# Altium PCB Board1.PcbDoc
Units mm, origin at the board's own origin, x right, y up, seen from the top; angles counter-clockwise.
Board outline 99.44 x 99.31 mm, 2 copper layers (Top Layer, Bottom Layer); 118 components, 68 nets, 479 pads, 4 vias.
Unrouted connection lines stored in the file: 256.
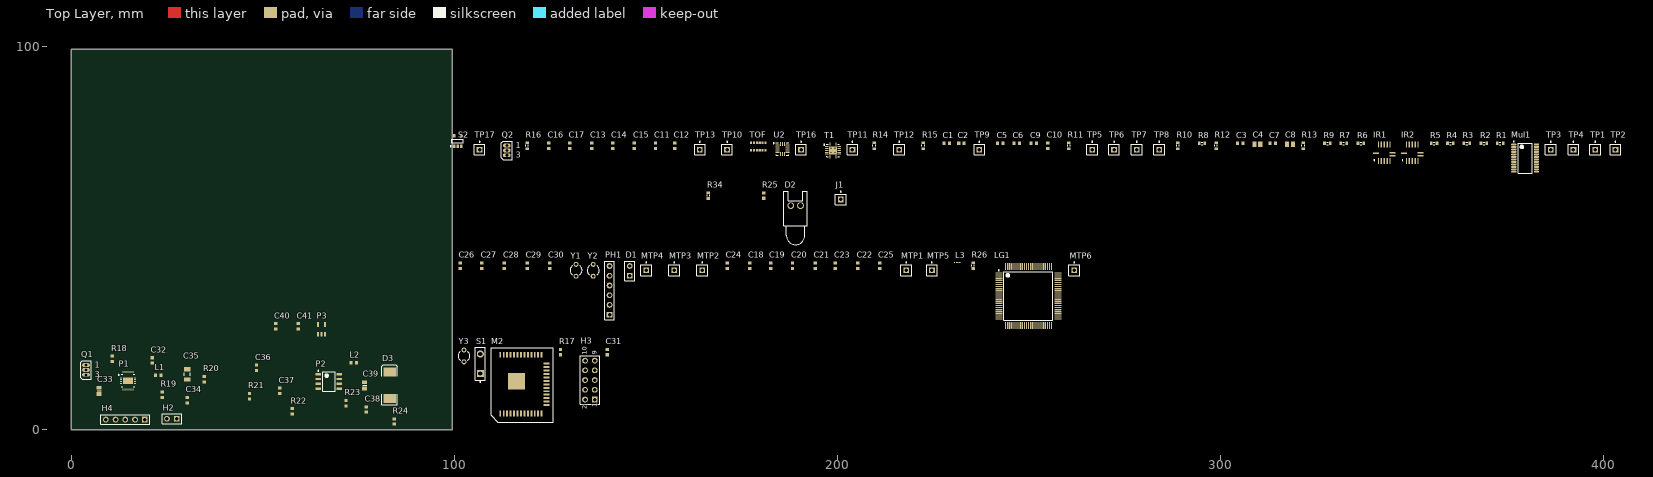
[diagram p0: Top Layer view]
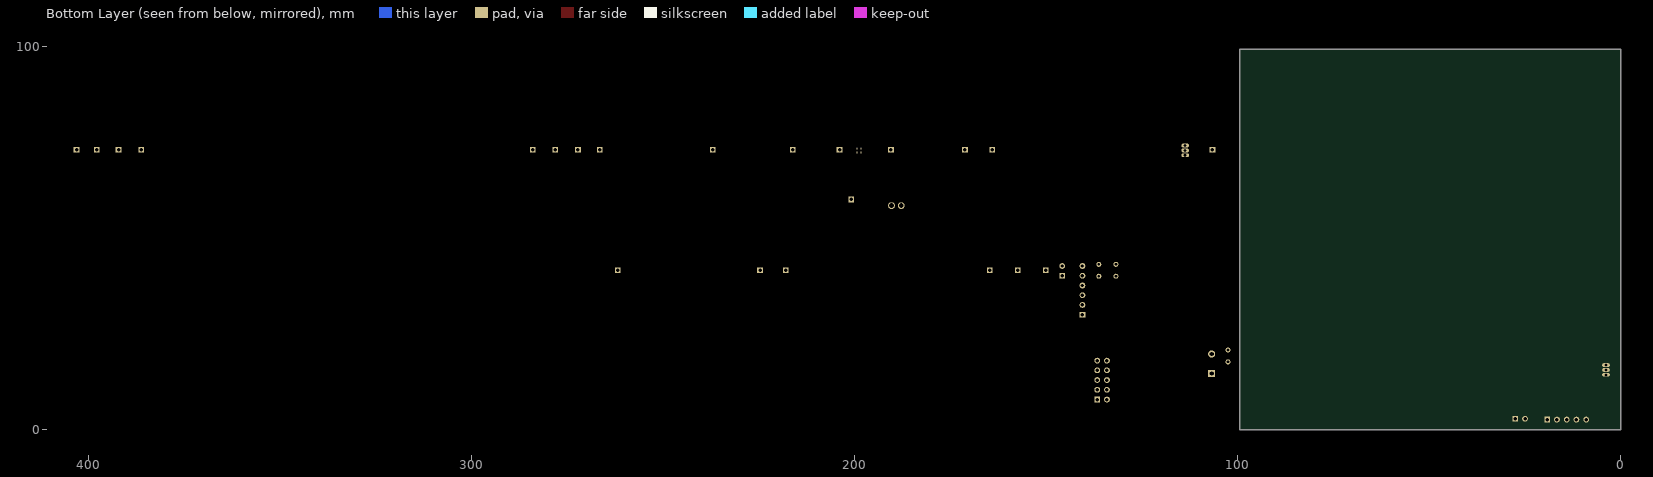
[diagram p1: Bottom Layer view, seen from below]

## Layer stack, top to bottom
Top Solder: solder mask 0.0102, Solder Resist, Dk 3.5
Top Layer: signal copper 0.0356
Dielectric1: dielectric 0.32, FR-4, Dk 4.8
Bottom Layer: signal copper 0.0356
Bottom Solder: solder mask 0.0102, Solder Resist, Dk 3.5

## Board outline
0,0 0,99.314 99.441,99.314 99.441,0

## Design rules (kind name [scope] priority, off if disabled: settings)
Clearance [All] p1: gap=0.254 ignorepadtopadclearanceinfootprint=FALSE except(0: Arc-Hole Track-Hole SMDPad-Hole THPad-Hole Via-Hole Fill-Hole Poly-Hole Region-Hole Text-Hole; 0.203: Arc-SMDPad Track-Track Track-SMDPad SMDPad-SMDPad; 0.508: Arc-Via Track-Via THPad-Via Via-Via; 0.635: Arc-Poly Track-Poly SMDPad-Poly THPad-Poly Via-Poly Fill-Poly Poly-Poly)
FabricationTestPointUsage TestPointUsage [All] p1: valid=0 allowmultiple=FALSE
FabricationTestpoint Testpoint [All] p1: side=3 testpointundercomponent=TRUE minsize=1.016 maxsize=2.54 preferedsize=1.524 minholesize=0 maxholesize=1.016 preferedholesize=0.813 testpointgrid=0.025 allowsidetop=TRUE allowsidebottom=TRUE usegrid=TRUE gridtolerance=0
PolygonConnect [All] p1: connectstyle=Relief reliefconductorwidth=0.254 reliefentries=4 polygonreliefangle="90 Angle" airgapwidth=0.254
RoutingVias [All] p1: holewidth=0.305 width=0.61 viastyle="Through Hole" minholewidth=0.254 minwidth=0.508 maxholewidth=0.356 maxwidth=0.711
SilkToSolderMaskClearance SilkscreenOverComponentPads [IsPad] p1: minsilkscreentomaskgap=0.254 clearancetoexposedcopper=TRUE
SolderMaskExpansion [All] p1: expansion=0.102
Width Width_1 [All] p1: maxlimit=0.254 minlimit=0.254 preferedwidth=0.254
Width Width_power [(InNet('2.8V') OR InNet('3.3V') OR InNet('4V') OR InNet('5V') OR InNet('GND'))] p2: maxlimit=0.508 minlimit=0.305 preferedwidth=0.508
27 further rules are at their usual default settings.

## Components (designator, comment, footprint, x,y, rotation, side; value= is the part's Value field where it differs from the comment)
C1 "Cap Semi" 1608[0603] 228.498,74.727 r0 top value=10uF
C2 "Cap Semi" 1608[0603] 232.359,74.727 r0 top value=0.1uF
C3 "Cap Semi" 1608[0603] 305.105,74.727 r0 top value=0.1uF
C4 "Cap Semi" C0805 309.575,74.524 r0 top value=22uF
C5 "Cap Semi" 1608[0603] 242.519,74.727 r0 top value=10uF
C6 "Cap Semi" 1608[0603] 246.786,74.727 r0 top value=0.1uF
C7 "Cap Semi" 1608[0603] 313.639,74.727 r0 top value=0.1uF
C8 "Cap Semi" C0805 318.11,74.524 r0 top value=22uF
C9 "Cap Semi" 1608[0603] 251.257,74.727 r0 top value=10uF
C10 "Cap Semi" 1608[0603] 254.914,74.117 r90 top value=0.1uF
C11 "Cap Semi" 1608[0603] 152.502,74.117 r90 top value=4.7uF
C12 "Cap Semi" 1608[0603] 157.582,74.117 r90 top value=0.1uF
C13 "Cap Semi" 1608[0603] 135.839,74.117 r90 top value=4.7uF
C14 "Cap Semi" 1608[0603] 141.326,74.117 r90 top value=0.1uF
C15 "Cap Semi" 1608[0603] 147.015,74.117 r90 top value=0.1uF
C16 "Cap Semi" 1608[0603] 124.663,74.117 r90 top value=1uF
C17 "Cap Semi" 1608[0603] 130.15,74.117 r90 top value=1uF
C18 "Cap Semi" 1608[0603] 177.089,42.824 r90 top value=0.1uF
C19 "Cap Semi" 1608[0603] 182.575,42.824 r90 top value=0.1uF
C20 "Cap Semi" 1608[0603] 188.265,42.824 r90 top value=0.1uF
C21 "Cap Semi" 1608[0603] 194.158,42.824 r90 top value=0.1uF
C22 "Cap Semi" 1608[0603] 205.334,42.824 r90 top value=0.1uF
C23 "Cap Semi" 1608[0603] 199.441,42.824 r90 top value=0.1uF
C24 "Cap Semi" 1608[0603] 171.196,42.824 r90 top value=10uF
C25 "Cap Semi" 1608[0603] 211.023,42.824 r90 top value=10uF
C26 "Cap Semi" 1608[0603] 101.498,42.824 r90 top value=1uF
C27 "Cap Semi" 1608[0603] 107.188,42.824 r90 top value=7.5pF
C28 "Cap Semi" 1608[0603] 113.081,42.824 r90 top value=7.5pF
C29 "Cap Semi" 1608[0603] 118.974,42.824 r90 top value=18pF
C30 "Cap Semi" 1608[0603] 124.866,42.824 r90 top value=18pF
C31 "Cap Semi" 1608[0603] 139.903,20.269 r90 top value=10uF
C32 "Cap Semi" 1608[0603] 21.133,18.085 r90 top value=0.1uF
C33 "Cap" 6-0805_L 7.315,10.16 r90 top value=47uF
C34 "Cap" 1608[0603] 30.277,7.722 r90 top value=0.1uF
C35 "Cap" C1206 30.277,14.427 r90 top value=22uF
C36 "Cap" 1608[0603] 48.362,16.166 r90 top value=4.7uF
C37 "Cap" 1608[0603] 54.458,10.16 r90 top value=100pF
C38 "Cap" 1608[0603] 77.013,5.283 r90 top value=330pF
C39 "Cap" 6-0805_L 76.606,11.582 r90 top value=47uF
C40 "Cap Semi" 1608[0603] 53.34,26.975 r90 top value=0.1uF
C41 "Cap Semi" 1608[0603] 59.233,26.975 r90 top value=0.1uF
D1 "Data Out" HDR1X2 145.796,40.183 r90 top
D2 "LED0" LED-0 189.078,58.471 r0 top
D3 "Diode" SMC 83.109,11.582 r90 top
H2 "Li-on" HDR1X2 27.534,2.845 r180 top
H3 "Header 5X2" HDR2X5 136.652,7.874 r90 top
H4 "USB Header" HDR1X5 19.202,2.642 r180 top
IR1 "VCNL4010" 13-WQFN 342.697,72.288 r0 top
IR2 "VCNL4010" 13-WQFN 350.012,72.288 r0 top
J1 "Socket" PIN1 200.863,60.096 r0 top
L1 "Inductor" 1608[0603] 22.758,14.224 r0 top value=3.3uH
L2 "Inductor" 1608[0603] 73.762,17.475 r0 top value=4.7uH
L3 "Inductor" 0603 231.546,43.637 r0 top value="1kohm @ 100 MHz"
LG1 "" ENMR-LQFP100_M 249.834,34.9 r0 top
M2 "" atmel_samb11 124.054,4.216 r90 top
MTP1 "Socket" PIN1 217.932,41.605 r0 top
MTP2 "Socket" PIN1 164.694,41.605 r0 top
MTP3 "Socket" PIN1 157.378,41.605 r0 top
MTP4 "Socket" PIN1 150.063,41.605 r0 top
MTP5 "Socket" PIN1 224.638,41.605 r0 top
MTP6 "Socket" PIN1 261.823,41.605 r0 top
Mul1 "TCA9548A" TTSOP-24 379.476,70.866 r0 top
P1 "LTC4160EUDC#PBF" LT4160 14.834,12.802 r0 top
P2 "LT1308IS8" LTC1308 67.259,12.598 r0 top
P3 "MIC5219 2.8V" SOT23-5 65.329,26.162 r0 top
PH1 "Programming Header" HDR1X6 140.513,30.023 r90 top
Q1 "MOSFET-N" E3 3.861,15.596 r0 top
Q2 "MOSFET-N" E3 113.69,72.898 r0 top
R1 "Res3" J1-0603 372.974,74.727 r0 top value=4.7K
R2 "Res3" J1-0603 368.706,74.727 r0 top value=4.7K
R3 "Res3" J1-0603 364.236,74.727 r0 top value=4.7K
R4 "Res3" J1-0603 359.969,74.727 r0 top value=4.7K
R5 "Res3" J1-0603 355.702,74.727 r0 top value=4.7K
R6 "Res3" J1-0603 336.601,74.727 r0 top value=4.7K
R7 "Res3" J1-0603 332.13,74.727 r0 top value=4.7K
R8 "Res3" J1-0603 295.148,74.727 r0 top value=4.7K
R9 "Res3" J1-0603 327.863,74.727 r0 top value=4.7K
R10 "Res3" J1-0603 288.849,74.117 r90 top value=4.7K
R11 "Res3" J1-0603 260.401,74.117 r90 top value=10K
R12 "Res3" J1-0603 298.806,74.117 r90 top value=10
R13 "Res3" J1-0603 321.564,74.117 r90 top value=10
R14 "Res3" J1-0603 209.601,74.117 r90 top value=4.7K
R15 "Res3" J1-0603 222.402,74.117 r90 top value=4.7K
R16 "Res3" J1-0603 118.974,74.117 r90 top value=2.2K
R17 "Res1" 1608[0603] 127.711,20.269 r90 top value=10K
R18 "Res1" 1608[0603] 10.77,18.491 r90 top value=6.2K
R19 "Res1" 1608[0603] 23.774,9.144 r90 top value=1K
R20 "Res1" 1608[0603] 34.747,13.208 r90 top value=3.01K
R21 "Res1" 1608[0603] 46.533,8.738 r90 top value=47K
R22 "Res1" 1608[0603] 57.709,4.786 r90 top value=10K
R23 "Res1" 1608[0603] 71.73,6.909 r90 top value=35.7K
R24 "Res1" 1608[0603] 84.328,2.145 r90 top value=11.3K
R25 "Res1" 1608[0603] 180.746,61.112 r90 top value=3K
R26 "Res3" J1-0603 235.407,42.824 r90 top value=10
R34 "Res3" J1-0603 166.319,61.112 r90 top value=0
S1 "SW-PB" SPST-2 106.782,17.221 r90 top
S2 "LTC1981" LTC1981 100.889,75.336 r90 top
T1 "TXS0104E" TXS01014E 198.831,72.898 r0 top
TOF "VL6180" VL6180 179.324,73.914 r0 top
TP1 "Socket" PIN1 397.764,73.101 r0 top
TP2 "Socket" PIN1 403.047,73.101 r0 top
TP3 "Socket" PIN1 386.182,73.101 r0 top
TP4 "Socket" PIN1 392.074,73.101 r0 top
TP5 "Socket" PIN1 266.497,73.101 r0 top
TP6 "Socket" PIN1 272.186,73.101 r0 top
TP7 "Socket" PIN1 278.079,73.101 r0 top
TP8 "Socket" PIN1 283.972,73.101 r0 top
TP9 "Socket" PIN1 237.033,73.101 r0 top
TP10 "Socket" PIN1 171.196,73.101 r0 top
TP11 "Socket" PIN1 203.911,73.101 r0 top
TP12 "Socket" PIN1 216.103,73.101 r0 top
TP13 "Socket" PIN1 164.084,73.101 r0 top
TP16 "Socket" PIN1 190.5,73.101 r0 top
TP17 "Socket" PIN1 106.578,73.101 r0 top
U2 "MMA8452Q" MMA8452Q_jk 185.623,73.304 r0 top
Y1 "XTAL" R38 131.775,41.605 r0 top
Y2 "XTAL" R38 136.246,41.605 r0 top
Y3 "XTAL" R38 102.514,19.253 r0 top

## Footprints (in the part's own frame and the unit in brackets; to place one, negate y for a bottom-side part, rotate by r counter-clockwise, add the part's x,y. Pads: shape width x height; smd on the part's side, far side on the other; paste and mask are expansions set on the pad)
6-0805_L [mm] "Chip Resistor, Body 2.0x1.2mm, IPC High Density"
  rect 1x1.3 smd: 1(-0.8,0) 2(0.8,0)
  silkscreen extent 0,-0.55 0,0.55, body extent -1.07,-0.7 1.07,0.7, height 0.7
13-WQFN [mm] "Footprint for VCNL4010"
  rect 0.35x1.605 smd: 1(-1.5,-2.173) 2(-0.75,-2.173) 3(0,-2.173) 4(0.75,-2.173) 5(1.5,-2.173) 7(1.5,2.173) 8(0.75,2.173) 9(0,2.173) 10(-0.75,2.173) 11(-1.5,2.173)
  rect 1.605x0.4 smd: 6(2.173,-0.8) 12(-2.173,-0.175) 13(2.173,0)
  silkscreen extent -2.67,-2.03 -2.41,-1.78, body extent -1.97,-1.97 1.98,1.98, height 0.75
0603 [mm] "Chip Inductor, Body 0.6x0.3mm, IPC High Density"
  rect 0.5x0.3 smd: 1(-0.35,0) 2(0.35,0)
  silkscreen extent -0.9,-0.05 -0.9,0.05, body extent -0.33,-0.18 0.33,0.18, height 0.55
1608[0603] [mm] "Chip Capacitor, Body 1.6x0.8mm, IPC High Density"
  rect 0.8x0.9 smd: 1(-0.7,0) 2(0.7,0)
  body extent -0.87,-0.48 0.87,0.48, height 1.3
atmel_samb11 [mm]
  rect 1.5x0.5 smd: 1(0,12.066) 2(0,11.166) 3(0,10.266) 4(0,9.366) 5(0,8.466) 6(0,7.566) 7(0,6.666) 8(0,5.766) 9(0,4.866) 10(0,3.966) 11(0,3.066) 12(0,2.166) 13(0,1.266) 27(15.367,1.266) 28(15.367,2.166) 29(15.367,3.066) 30(15.367,3.966) 31(15.367,4.866) 32(15.367,5.766) 33(15.367,6.666) 34(15.367,7.566) 35(15.367,8.466) 36(15.367,9.366) 37(15.367,10.266) 38(15.367,11.166) 39(15.367,12.066)
  rect 0.5x1.5 smd: 14(2.222,0) 15(3.122,0) 16(4.022,0) 17(4.922,0) 18(5.822,0) 19(6.722,0) 20(7.622,0) 21(8.522,0) 22(9.422,0) 23(10.322,0) 24(11.222,0) 25(12.122,0) 26(13.022,0)
  rect 4.4x4.4 smd: 40(8.424,7.806)
  silkscreen extent -2.29,-1.78 17.14,14.48
C0805 [mm] "Chip Capacitor, Body 2.0x1.3mm, IPC High Density"
  rect 1.1x1.4 smd: 1(-0.75,0) 2(0.75,0)
  body extent -1.1,-0.72 1.1,0.72, height 1.4
C1206 [mm] "Chip Capacitor, Body 3.2x1.6mm, IPC High Density"
  rect 1.1x1.7 smd: 1(-1.35,0) 2(1.35,0)
  silkscreen extent -0.4,-0.75 0.4,0.75, body extent -1.7,-0.9 1.7,0.9, height 1.3
E3 [mm] "TO, Flat Index; 3 In-Line, Axial Leads; Body Dia. 4.6mm; Lead Dia. 0.5 mm (max)"
  oval 2x1 hole 0.8: 1(0,1.27) 2(0,0) 3(0,-1.27)
  silkscreen extent -1.41,-2.41 1.41,2.41
ENMR-LQFP100_M [mm] "LQFP, 100-Leads, Body 14x14mm, Pitch 0.5mm, IPC Low Density"
  oval 1.85x0.3 smd: 1(-7.7,6) 2(-7.7,5.5) 3(-7.7,5) 4(-7.7,4.5) 5(-7.7,4) 6(-7.7,3.5) 7(-7.7,3) 8(-7.7,2.5) 9(-7.7,2) 10(-7.7,1.5) 11(-7.7,1) 12(-7.7,0.5) 13(-7.7,0) 14(-7.7,-0.5) 15(-7.7,-1) 16(-7.7,-1.5) 17(-7.7,-2) 18(-7.7,-2.5) 19(-7.7,-3) 20(-7.7,-3.5) 21(-7.7,-4) 22(-7.7,-4.5) 23(-7.7,-5) 24(-7.7,-5.5) 25(-7.7,-6) 51(7.7,-6) 52(7.7,-5.5) 53(7.7,-5) 54(7.7,-4.5) 55(7.7,-4) 56(7.7,-3.5) 57(7.7,-3) 58(7.7,-2.5) 59(7.7,-2) 60(7.7,-1.5) 61(7.7,-1) 62(7.7,-0.5) 63(7.7,0) 64(7.7,0.5) 65(7.7,1) 66(7.7,1.5) 67(7.7,2) 68(7.7,2.5) 69(7.7,3) 70(7.7,3.5) 71(7.7,4) 72(7.7,4.5) 73(7.7,5) 74(7.7,5.5) 75(7.7,6)
  oval 0.3x1.85 smd: 26(-6,-7.7) 27(-5.5,-7.7) 28(-5,-7.7) 29(-4.5,-7.7) 30(-4,-7.7) 31(-3.5,-7.7) 32(-3,-7.7) 33(-2.5,-7.7) 34(-2,-7.7) 35(-1.5,-7.7) 36(-1,-7.7) 37(-0.5,-7.7) 38(0,-7.7) 39(0.5,-7.7) 40(1,-7.7) 41(1.5,-7.7) 42(2,-7.7) 43(2.5,-7.7) 44(3,-7.7) 45(3.5,-7.7) 46(4,-7.7) 47(4.5,-7.7) 48(5,-7.7) 49(5.5,-7.7) 50(6,-7.7) 76(6,7.7) 77(5.5,7.7) 78(5,7.7) 79(4.5,7.7) 80(4,7.7) 81(3.5,7.7) 82(3,7.7) 83(2.5,7.7) 84(2,7.7) 85(1.5,7.7) 86(1,7.7) 87(0.5,7.7) 88(0,7.7) 89(-0.5,7.7) 90(-1,7.7) 91(-1.5,7.7) 92(-2,7.7) 93(-2.5,7.7) 94(-3,7.7) 95(-3.5,7.7) 96(-4,7.7) 97(-4.5,7.7) 98(-5,7.7) 99(-5.5,7.7) 100(-6,7.7)
  silkscreen extent -7.82,-6.38 6.38,6.82, body extent -7,-7 7,7, height 1.6
HDR1X2 [mm] "Connector; Header; 2 Position"
  rect 1.5x1.5 hole 0.9: 1(0,0)
  round 1.5 hole 0.9: 2(2.54,0)
  silkscreen extent -1.27,-1.27 3.81,1.27
HDR1X5 [mm] "Connector; Header; 5 Position"
  rect 1.5x1.5 hole 0.9: 1(0,0)
  round 1.5 hole 0.9: 2(2.54,0) 3(5.08,0) 4(7.62,0) 5(10.16,0)
  silkscreen extent -1.27,-1.27 11.43,1.27
HDR1X6 [mm] "Connector; Header; 6 Position"
  rect 1.5x1.5 hole 0.9: 1(0,0)
  round 1.5 hole 0.9: 2(2.54,0) 3(5.08,0) 4(7.62,0) 5(10.16,0) 6(12.7,0)
  silkscreen extent -1.27,-1.27 13.97,1.27
HDR2X5 [mm] "Connector; Header; 5x2 Position"
  rect 1.5x1.5 hole 0.9: 1(0,0)
  round 1.5 hole 0.9: 2(0,2.54) 3(2.54,0) 4(2.54,2.54) 5(5.08,0) 6(5.08,2.54) 7(7.62,0) 8(7.62,2.54) 9(10.16,0) 10(10.16,2.54)
  silkscreen extent -1.27,-1.27 11.43,3.81
J1-0603 [mm] "Chip Resistor, Body 1.6x0.8mm, IPC High Density"
  rect 0.7x0.9 smd: 1(-0.75,0) 2(0.75,0)
  silkscreen extent -0.2,-0.35 0.2,0.35, body extent -0.85,-0.48 0.85,0.48, height 0.9
LED-0 [mil] "LED; 2 Leads"
  round 70 hole 50: 1(50,0) 2(-50,0)
  silkscreen extent -120,-400 120,150
LT4160 [mm] "QFN, 20-Leads, Body 3.50x4.50mm, Pitch 0.50mm, Thermal Pad 2.65x1.65mm, IPC Medium Density"
  oval 0.55x0.25 smd: 1(-1.8,0.75) 2(-1.8,0.25) 3(-1.8,-0.25) 4(-1.8,-0.75) 11(1.8,-0.75) 12(1.8,-0.25) 13(1.8,0.25) 14(1.8,0.75)
  oval 0.25x0.55 smd: 5(-1.25,-2.3) 6(-0.75,-2.3) 7(-0.25,-2.3) 8(0.25,-2.3) 9(0.75,-2.3) 10(1.25,-2.3) 15(1.25,2.3) 16(0.75,2.3) 17(0.25,2.3) 18(-0.25,2.3) 19(-0.75,2.3) 20(-1.25,2.3)
  rect 2.65x1.65 smd: 21(0,0)
  silkscreen extent -2.55,-1.65 1.78,1.65, body extent -1.77,-2.27 1.78,2.27, height 1
LTC1308 [mm] "SOIC, 8-Leads, Body 4.90x3.90mm, Pitch 1.27mm, IPC Medium Density"
  rect 1.45x0.6 smd: 1(-2.725,1.905) 2(-2.725,0.635) 3(-2.725,-0.635) 4(-2.725,-1.905) 5(2.725,-1.905) 6(2.725,-0.635) 7(2.725,0.635) 8(2.725,1.905)
  silkscreen extent -2.85,-2.5 1.6,2.88, body extent -2,-2.5 2,2.5, height 1.35
LTC1981 [mm] "SOT23, 5-Leads, Body 2.90x2.80mm, Pitch 0.95mm, IPC Medium Density"
  rect 1x0.6 smd: 1(-1.375,0.95) 2(-1.375,0) 3(-1.375,-0.95) 4(1.375,-0.95) 5(1.375,0.95)
  silkscreen extent -1.5,-1.5 0.5,1.92, body extent -0.88,-1.5 0.87,1.5, height 1.45
MMA8452Q_jk [mm] "QFN, 16-Leads, Body 3.00x3.00mm, Pitch 0.50mm, IPC Medium Density"
  rect 1.05x0.25 smd: 1(-1.3,1) 2(-1.3,0.5) 3(-1.3,0) 4(-1.3,-0.5) 5(-1.3,-1) 9(1.3,-1) 10(1.3,-0.5) 11(1.3,0) 12(1.3,0.5) 13(1.3,1)
  rect 0.25x1.05 smd: 6(-0.5,-1.3) 7(0,-1.3) 8(0.5,-1.3) 14(0.5,1.3) 15(0,1.3) 16(-0.5,1.3)
  silkscreen extent -2.42,-1.65 1.65,1.65, body extent -1.5,-1.5 1.5,1.5, height 1
PIN1 [mm] "Connector; Plug"
  rect 1.5x1.5 hole 0.9: 1(0,0)
  silkscreen extent -1.4,-1.4 1.4,2.17
R38 [mm] "Crystal, Thru-Hole; 2 Leads; Body 3.1 x 8.2 mm (Dia.xH)"
  round 1.3 hole 0.7: 1(0,1.55) 2(0,-1.55)
  silkscreen extent -1.55,-1.19 1.55,1.17
SMC [mm] "DO-214-AB/SMC; 2 C-Bend Leads; Body 7.9 x 5.9 mm, inc. leads (LxW)"
  rect 2.4x3.3 smd: 1(-3.475,0) 2(3.475,0)
  silkscreen extent -5.07,-2.05 5.43,2.05
SOT23-5 [mm] "SOT23-5"
  rect 0.55x1.2 smd: 1(-0.95,-1.3) 2(0,-1.3) 3(0.95,-1.3) 4(0.95,1.3) 5(-0.95,1.3)
SPST-2 [mm] "Switch; 2 Leads"
  rect 1.85x1.85 hole 1.1: 1(-2.54,0)
  round 1.85 hole 1.1: 2(2.54,0)
  silkscreen extent -4.89,-1.27 4.28,1.27
TTSOP-24 [mm] "TSOP, 24-Leads, Body 7.80x4.40mm, Pitch 0.65mm, IPC Medium Density"
  oval 1.4x0.45 smd: 1(-2.95,3.575) 2(-2.95,2.925) 3(-2.95,2.275) 4(-2.95,1.625) 5(-2.95,0.975) 6(-2.95,0.325) 7(-2.95,-0.325) 8(-2.95,-0.975) 9(-2.95,-1.625) 10(-2.95,-2.275) 11(-2.95,-2.925) 12(-2.95,-3.575) 13(2.95,-3.575) 14(2.95,-2.925) 15(2.95,-2.275) 16(2.95,-1.625) 17(2.95,-0.975) 18(2.95,-0.325) 19(2.95,0.325) 20(2.95,0.975) 21(2.95,1.625) 22(2.95,2.275) 23(2.95,2.925) 24(2.95,3.575)
  silkscreen extent -3.07,-3.95 1.85,4.47, body extent -2.25,-3.95 2.25,3.95, height 1.2
TXS01014E [mm] "QFN, 14-Leads, Body 3.50x3.50mm, Pitch 1.50mm/0.50mm, Thermal Pad 2.05x2.05mm, IPC Medium Density"
  rect 0.9x0.25 smd: 1(-1.675,1) 2(-1.675,0.5) 3(-1.675,0) 4(-1.675,-0.5) 5(-1.675,-1) 8(1.675,-1) 9(1.675,-0.5) 10(1.675,0) 11(1.675,0.5) 12(1.675,1)
  rect 0.25x0.9 smd: 6(-0.75,-1.675) 7(0.75,-1.675) 13(0.75,1.675) 14(-0.75,1.675)
  rect 2.05x2.05 smd: 15(0,0)
  silkscreen extent -2.42,-1.65 1.65,1.65, body extent -1.83,-1.83 1.83,1.83, height 1
VL6180 [mm] "VL6180"
  rect 0.55x0.6 smd paste-0.3: 1(-1.875,-1) 2(-1.125,-1) 3(-0.375,-1) 4(0.375,-1) 5(1.125,-1) 6(1.875,-1) 7(1.875,1) 8(1.125,1) 9(0.375,1) 10(-0.375,1) 11(-1.125,1) 12(-1.875,1)

## Part data
C1 C5 C9 C24 C25: "Capacitor (Semiconductor SIM Model)", Digikey Part No=490-10474-1-ND, Manufacturer="Murata Electronics North America", Manufacturer Part Number=GRM188R61A106KE69D, ComponentLink1Description=Datasheet, ComponentLink1URL=http://search.murata.co.jp/Ceramy/image/img/A01X/partnumbering_e_01.pdf
C2 C6 C7 C10 C12 C14 C15 C18 C19 C20 C21 C22 C23: "Capacitor (Semiconductor SIM Model)", Digikey Part No=399-1095-1-ND, Manufacturer=KEMET, Manufacturer Part Number=C0603C104K8RACTU, ComponentLink1Description=Datasheet, ComponentLink1URL=http://www.kemet.com/Lists/ProductCatalog/Attachments/53/KEM_C1002_X7R_SMD.pdf
C3 C32 C40 C41: "CAP CER 0.1UF 10V X7R 0603", Digikey Part No=399-1095-1-ND, Manufacturer=KEMET, Manufacturer Part Number=C0603C104K8RACTU, ComponentLink1Description=Datasheet, ComponentLink1URL=http://www.kemet.com/Lists/ProductCatalog/Attachments/53/KEM_C1002_X7R_SMD.pdf
C4 C8: "Capacitor (Semiconductor SIM Model)", Digikey Part No=490-10511-1-ND, Manufacturer="Murata Electronics North America", Manufacturer Part Number=GRM21BR61A226ME51L, ComponentLink1Description=Datasheet, ComponentLink1URL=http://search.murata.co.jp/Ceramy/image/img/A01X/partnumbering_e_01.pdf
C11 C13: "Capacitor (Semiconductor SIM Model)", Digikey Part No=490-10477-1-ND, Manufacturer="Murata Electronics North America", Manufacturer Part Number=GRM188R61A475KE15D, ComponentLink1Description=Datasheet, ComponentLink1URL=http://search.murata.co.jp/Ceramy/image/img/A01X/partnumbering_e_01.pdf
C16 C17 C26: "Capacitor (Semiconductor SIM Model)", Digikey Part No=1276-1946-1-ND, Manufacturer="Samsung Electro-Mechanics America, Inc.", Manufacturer Part Number=CL10B105KP8NNNC, ComponentLink1Description=Datasheet, ComponentLink1URL=http://www.digikey.com/product-detail/en/samsung-electro-mechanics-america-inc/CL10B105KP8NNNC/1276-1946-1-ND/3890032
C27 C28: "Capacitor (Semiconductor SIM Model)", Manufacturer=AVX, Manufacturer Part Number=02013A7R5BAT2A, Mouser Part No=581-02013A7R5BAT2A, ComponentLink1Description=Datasheet, ComponentLink1URL=http://www.mouser.com/ProductDetail/AVX/02013A7R5BAT2A/?qs=sGAEpiMZZMs0AnBnWHyRQB52zW9BgkFE2gr3mrXUPHs%3d
C29 C30: "Capacitor (Semiconductor SIM Model)", Digikey Part No=712-1321-1-ND, Manufacturer="Johanson Technology Inc.", Manufacturer Part Number=251R14S180GV4T, ComponentLink1Description=Datasheet, ComponentLink1URL=http://www.digikey.com/product-detail/en/johanson-technology-inc/251R14S180GV4T/712-1321-1-ND/1786783
C31: "CAP CER 10UF 10V X5R 0603", Digikey Part No=490-10474-1-ND, Manufacturer="Murata Electronics North America", Manufacturer Part Number=GRM188R61A106KE69D, ComponentLink1Description=Datasheet, ComponentLink1URL=http://search.murata.co.jp/Ceramy/image/img/A01X/partnumbering_e_01.pdf
C33 C39: "CAP CER 47UF 6.3V X5R 0805", Digikey Part No=490-13249-1-ND, Manufacturer="Murata Electronics North America", Manufacturer Part Number=GRM219R60J476ME44D, ComponentLink1Description=Datasheet, ComponentLink1URL=http://search.murata.co.jp/Ceramy/image/img/A01X/partnumbering_e_01.pdf
C34: "CAP CER 0.1UF 16V X7R 0603", Digikey Part No=311-1088-1-ND, Manufacturer=Yageo, Manufacturer Part Number=CC0603KRX7R7BB104, ComponentLink1Description=Datasheet, ComponentLink1URL=http://www.yageo.com/documents/recent/UPY-GPHC_X7R_6.3V-to-50V_17.pdf
C35: "CAP CER 22UF 6.3V X5R 1206", Digikey Part No=GRM319R60J226ME15D-ND, Manufacturer="Murata Electronics North America", Manufacturer Part Number=GRM319R60J226ME15D, ComponentLink1Description=Datasheet, ComponentLink1URL=http://search.murata.co.jp/Ceramy/image/img/A01X/partnumbering_e_01.pdf
C36: "CAP CER 4.7UF 6.3V X7R 0603", Digikey Part No=1276-2087-1-ND, Manufacturer="Samsung Electro-Mechanics America, Inc.", Manufacturer Part Number=CL10B475KQ8NQNC, ComponentLink1Description=Datasheet, ComponentLink1URL=http://media.digikey.com/pdf/Data%20Sheets/Samsung%20PDFs/CL10B475KQ8NQNC_Spec.pdf
C37: "CAP CER 100PF 50V X7R 0603", Digikey Part No=399-7824-1-ND, Manufacturer=KEMET, Manufacturer Part Number=C0603C101K5RACTU, ComponentLink1Description=Datasheet, ComponentLink1URL=http://www.kemet.com/docfinder?Partnumber=C0603C101K5RACTU
C38: "CAP CER 330PF 100V X7R 0603", Digikey Part No=1276-6658-1-ND, Manufacturer="Samsung Electro-Mechanics America, Inc.", Manufacturer Part Number=CL10B331KC8WPNC, ComponentLink1Description=Datasheet, ComponentLink1URL=http://www.samsungsem.com/kr/support/library/product-catalog/__icsFiles/afieldfile/2016/09/27/MLCC.pdf
D1: library part "Header 2", "Header, 2-Pin", LatestRevisionDate=17-Jul-2002, LatestRevisionNote="Re-released for DXP Platform.", Publisher="Altium Limited"
D2: "Typical INFRARED GaAs LED", LatestRevisionDate=08-Jul-2005, LatestRevisionNote="Mech Layer 1 removed.", PackageDescription="LED; 2 Leads", PackageReference=LED-0, Published=8-Jun-2000, Publisher="Altium Limited"
D3: "Default Diode", Code_JEDEC=DO-214-AB, LatestRevisionDate=17-Jul-2002, LatestRevisionNote="Re-released for DXP Platform.", PackageDescription="DO-214-AB/SMC; 2 C-Bend Leads; Body 7.9 x 5.9 mm, inc. leads (LxW)", PackageReference=SMC, PackageVersion=Sep-1996, Published=8-Jun-2000, Publisher="Altium Limited"
H2: library part "Header 2", "CONN HEADER PH TOP 2POS 2MM", Digikey Part No=455-1704-ND, Manufacturer="JST Sales America Inc.", Manufacturer Part Number=B2B-PH-K-S(LF)(SN), ComponentLink1Description=Datasheet, ComponentLink1URL=http://www.jst-mfg.com/product/pdf/eng/ePH.pdf
H3: "Header, 5-Pin, Dual row", LatestRevisionDate=17-Jul-2002, LatestRevisionNote="Re-released for DXP Platform.", Publisher="Altium Limited"
H4: library part "Header 5", "Header, 5-Pin", LatestRevisionDate=17-Jul-2002, LatestRevisionNote="Re-released for DXP Platform.", Publisher="Altium Limited"
IR1 IR2: "VCNL4010 Proximity and Ambient Light Sensor", Digikey Part Number=VCNL4010-GS08CT-ND, Manufacturer=Vishay, Part Number=VCNL4010
L1: "FIXED IND 3.3UH 30MA 1.3 OHM SMD", Digikey Part No=587-1584-1-ND, Manufacturer="Taiyo Yuden", Manufacturer Part Number=LK16083R3K-T, ComponentLink1Description Datasheet=Datasheet, ComponentLink1URL=http://www.yuden.co.jp/productdata/catalog/en/mlci01_e.pdf
L2: "FIXED IND 4.7UH 350MA 500 MOHM", Digikey Part No=445-6390-1-ND, Manufacturer="TDK Corporation", Manufacturer Part Number=MLZ1608M4R7WT000, ComponentLink1Description Datasheet=Datasheet, ComponentLink1URL=https://product.tdk.com/info/en/catalog/datasheets/inductor_commercial_decoupling_mlz1608_en.pdf
L3: Part Number=74279266, Code_IEC=1005, Code_JEITA=0402, LatestRevisionDate=29-May-2009, LatestRevisionNote="IPC-7351 Footprint Added.", PackageDescription="Chip Inductor", PackageReference=0402-A, Published=8-Jun-2000, Publisher="Altium Limited"
LG1: library part EFM32LG980F256-QFP100, "EFM32 Leopard Gecko, M3 ARM Cortex CPU, 256 KB Flash, 32 KB RAM, 1.85 - 3.8 V Supply, 48 MHz Max Speed, -40 to 85 degC, 100-Pin LQFP, RoHS Compliant", Generic Part Number=EFM32LG980, Supplier Part Number 1=914-1058-2-ND, Supply Voltage (V)="1.85 - 3.8", ARM Cortex CPU=M3, ComponentLink1Description="Manufacturer URL", ComponentLink1URL=http://www.energymicro.com/, ComponentLink2Description=Datasheet, ComponentLink2URL=http://cdn.energymicro.com/dl/devices/pdf/d0122_efm32lg980_datasheet.pdf, ComponentLink3Description="Package Specification", ComponentLink3URL=http://cdn.energymicro.com/dl/devices/pdf/d0006_efm32g280_datasheet.pdf, DatasheetVersion="Rev 1.00", Flash (KB)=256, GPIO=83, LCD=8x34, LESENSE=Y, Max Speed (MHz)=48, Mounting Technology="Surface Mount", OPAMPS=3, PackageDescription="100-Pin Low rofile Quad Flat Package, Body 14 x 14 mm, Pitch 0.5 mm", PackageReference=LQFP100, PackageVersion="Rev. 98A0100QP043_03MAY2007", PartNumber=EFM32LG980F256-QFP100, RAM (KB)=32, Subcategory="EFM32 Leopard Gecko", Supplier 1=Digi-Key, Supplier 2=Digi-Key, Supplier 3=Digi-Key, Supplier 4=Mouser, Supplier Part Number 2=914-1058-1-ND, Supplier Part Number 3=914-1058-6-ND, Supplier Part Number 4=904-EFM32LG980F256, USB=Y
M2: library part ATSAMB11, "Radio"
Mul1: "8-Channel I2C Switch", Digikey Part Number=296-39222-1-ND, Manufacturer="Texas Instruments", Part Number=TCA9548A
P1: "IC SWITCH POWER MANAGER 20-QFN", Digikey Part No=TC4160EUDC#PBF-ND, Manufacturer="Linear Technology", ComponentLink1Description=Datasheet, ComponentLink1URL=http://www.linear.com/docs/27893, Manufacturer Part Number=LTC4160EUDC#PBF
P2: "IC REG BOOST ADJ 2A 8SOIC", Digikey Part No=LT1308IS8#PBF-ND, Manufacturer="Linear Technology", Manufacturer Part Number=LT1308IS8#PBF, ComponentLink1Description=Datasheet, ComponentLink1URL=http://www.linear.com/docs/1489
P3: library part V_REG_MIC52193.3V, "V_REG MIC5219Standard 3.3V and 5V 500mA LDO voltage regulator in SOT-23 layout. Micrel part MIC5219. BP (by-pass) pin is used to lower output noise with 470pF cap, may be left open.", PROD_ID=VREG-09872
PH1: library part "Header 6", "Header, 6-Pin", LatestRevisionDate=17-Jul-2002, LatestRevisionNote="Re-released for DXP Platform.", Publisher="Altium Limited"
Q1 Q2: "N-Channel MOSFET", LatestRevisionDate=17-Jul-2002, LatestRevisionNote="Re-released for DXP Platform.", PackageDescription="TO, Flat Index; 3 In-Line, Axial Leads; Body Dia. 4.6mm; Lead Dia. 0.5 mm (max)", PackageReference=E3, PackageVersion=1995/1996, Published=8-Jun-2000, Publisher="Altium Limited"
R1 R2 R3 R4 R5 R6 R7 R8 R9 R10 R14 R15: "Resistor", Digikey Part No=311-4.7KGRCT-ND, Manufacturer=Yageo, Manufacturer Part Number=RC0603JR-074K7L, ComponentLink1Description=Datasheet, ComponentLink1URL=http://www.digikey.com/product-detail/en/yageo/RC0603JR-074K7L/311-4.7KGRCT-ND/729732
R11: "Resistor", Digikey Part No=311-10KJRCT-ND, Manufacturer=Yageo, Manufacturer Part Number=RC0402JR-0710KL, ComponentLink1Description=Datasheet, ComponentLink1URL=http://www.digikey.com/product-detail/en/yageo/RC0402JR-0710KL/311-10KJRCT-ND/729365
R12 R13 R26: "Resistor", Digikey Part No=311-10.0HRCT-ND, Manufacturer=Yageo, Manufacturer Part Number=RC0603FR-0710RL, ComponentLink1Description=Datasheet, ComponentLink1URL=http://www.digikey.com/product-detail/en/yageo/RC0603FR-0710RL/311-10.0HRCT-ND/729826
R16: "Resistor", Digikey Part No=311-2.20KLRCT-ND, Manufacturer=Yageo, Manufacturer Part Number=RC0402FR-072K2L, ComponentLink1Description=Datasheet, ComponentLink1URL=http://www.digikey.com/product-detail/en/yageo/RC0402FR-072K2L/311-2.20KLRCT-ND/729500
R17 R22 R25: "RES SMD 10K OHM 1% 1/10W 0603", Digikey Part No=311-10.0KHRCT-ND, Manufacturer=Yageo, Manufacturer Part Number=RC0603FR-0710KL, ComponentLink1Description=Datasheet, ComponentLink1URL=http://www.yageo.com.tw/exep/pages/download/literatures/PYu-R_INT-thick_7.pdf
R18: "RES SMD 6.2K OHM 1% 1/10W 0603", Digikey Part No=311-6.20KHRCT-ND, Manufacturer=Yageo, Manufacturer Part Number=RC0603FR-076K2L, ComponentLink1Description=Datasheet, ComponentLink1URL=http://www.yageo.com.tw/exep/pages/download/literatures/PYu-R_INT-thick_7.pdf
R19: "RES SMD 1K OHM 1% 1/10W 0603", Digikey Part No=311-1.00KHRCT-ND, Manufacturer=Yageo, Manufacturer Part Number=RC0603FR-071KL, ComponentLink1Description=Datasheet, ComponentLink1URL=http://www.yageo.com.tw/exep/pages/download/literatures/PYu-R_INT-thick_7.pdf
R20: "RES SMD 3.01K OHM 1% 1/10W 0603", Digikey Part No=311-3.01KHRCT-ND, Manufacturer=Yageo, Manufacturer Part Number=RC0603FR-073K01L, ComponentLink1Description=Datasheet, ComponentLink1URL=http://www.yageo.com.tw/exep/pages/download/literatures/PYu-R_INT-thick_7.pdf
R21: "RES SMD 47K OHM 1% 1/10W 0603", Digikey Part No=311-47.0KHRCT-ND, Manufacturer=Yageo, Manufacturer Part Number=RC0603FR-0747KL, ComponentLink1Description=Datasheet, ComponentLink1URL=http://www.yageo.com.tw/exep/pages/download/literatures/PYu-R_INT-thick_7.pdf
R23: "RES SMD 35.7K OHM 1% 1/10W 0603", Digikey Part No=311-35.7KHRCT-ND, Manufacturer=Yageo, Manufacturer Part Number=RC0603FR-0735K7L, ComponentLink1Description=Datasheet, ComponentLink1URL=http://www.yageo.com.tw/exep/pages/download/literatures/PYu-R_INT-thick_7.pdf
R24: "RES SMD 11.3K OHM 1% 1/10W 0603", Digikey Part No=311-11.3KHRCT-ND, Manufacturer=Yageo, Manufacturer Part Number=RC0603FR-0711K3L, ComponentLink1Description=Datasheet, ComponentLink1URL=http://www.yageo.com.tw/exep/pages/download/literatures/PYu-R_INT-thick_7.pdf
R34: "Resistor", LatestRevisionDate=29-May-2009, LatestRevisionNote="IPC-7351 Footprint Added.", PackageDescription="Chip Resistor", PackageReference=J1-0603, Published=8-Jun-2000, Publisher="Altium Limited"
S1: "Switch", LatestRevisionDate=17-Jul-2002, LatestRevisionNote="Re-released for DXP Platform.", PackageDescription="Switch; 2 Leads", PackageReference=SPST-2, Published=24-Mar-1999, Publisher="Altium Limited"
T1: "TXS0104E LEVEL SHIFTER"
U2: "MMA8452Q 3-Axis, 12/8-bit Digital Accelerometer  Supply Voltage: 1.6-3.6V  Range: +/- 2g, 4g, 8g  Interface: I2C, 12-bit and 8-bit  ODR: 1.56 Hz - 800 Hz  Package: QFN-16      http://cache.freescale.com/files/sensors/doc/data_sheet/MMA8452Q.pdf"
Y1 Y2 Y3: "Crystal Oscillator", LatestRevisionDate=17-Jul-2002, LatestRevisionNote="Re-released for DXP Platform.", PackageDescription="Crystal, Thru-Hole; 2 Leads; Body 3.1 x 8.2 mm (Dia.xH)", PackageReference=R38, Published=8-Jun-2000, Publisher="Altium Limited"
J1 MTP1 MTP2 MTP3 MTP4 MTP5 MTP6 TP1 TP2 TP3 TP4 TP5 TP6 TP7 TP8 TP9 TP10 TP11 TP12 TP13 TP16 TP17: LatestRevisionDate=17-Jul-2002, LatestRevisionNote="Re-released for DXP Platform.", Publisher="Altium Limited"
TOF: PROD_ID=IC-12007

## Via types
v1: diameter 0.5, hole 0.2, Top Layer to Bottom Layer, 4 vias

## Nets (pads, with @x,y where several pads share a name; then routed paths per layer and width w, separated by ;. In a path a pad name is that pad's centre, name@x,y a point inside that pad or via, vN(x,y) a via of type N, cw(c..) or ccw(c..) an arc to the next point about the centre after c; other vN are vias at no path point)
2.8V: C11.2 C12.2 C16.2 C41.2 P3.5 R5.2 R6.2 R14.2 R15.2 T1.1 TOF.8 TOF.10
3.3V: C1.2 C17.2 C18.2 C19.2 C20.2 C21.2 C24.2 C32.1 L3.2 LG1.8 LG1.17 LG1.31 LG1.44 LG1.57 LG1.82 M2.31 MTP5.1 Mul1.24 P1.18 PH1.1 R9.1 R10.1 R17.2 T1.14 TP9.1
4V: C31.2 C35.2 C36.2 C40.2 H3.1 L1.2 L2.1 M2.4 P1.12 P2.3 P2.6 P3.1 P3.3
5V: C38.2 C39.2 D3.2 Q2.1 R23.2 S2.5
BLE_LEUART_RX: LG1.50 M2.5 MTP1.1
BLE_LEUART_TX: LG1.51 M2.6 MTP2.1
GND: C1.1 C3.1 C5.1 C6.1 C7.1 C10.1 C11.1 C13.1 C14.1 C15.1 C16.1 C17.1 C18.1 C19.1 C20.1 C21.1 C22.1 C23.1 C24.1 C25.1 C26.1 C27.1 C28.1 C29.1 C30.1 C31.1 C32.2 C33.1 C34.2 C35.1 C36.1 C37.1 C39.1 C40.1 C41.1 D2.2 H2.2 H3.3 H3.5 H3.9 H4.5 IR1.12 IR1.13 IR2.12 IR2.13 LG1.16 LG1.32 LG1.58 LG1.83 M2.1 M2.14 M2.26 M2.39 M2.40 Mul1.1 Mul1.2 Mul1.12 Mul1.21 P1.7 P1.20 P1.21 P2.4 P3.2 PH1.6 R16.1 R19.1 R20.2 R24.1 S1.1 S2.2 T1.7 TOF.9 TOF.12 U2.5 U2.7 U2.10 U2.12
GPIO_EM4WUO: LG1.1 MTP6.1
HFXTAL_N: C27.2 LG1.43 Y1.1
HFXTAL_P: C28.2 LG1.42 Y1.2
ID: P1.5 R34.1
IR_PWR: C3.2 C7.2 IR1.1 IR2.1 Q2.3 TP17.1
IR_PWR_CTRL: LG1.18 S2.3
LFXTAL_N: C29.2 LG1.25 Y2.1
LFXTAL_P: C30.2 LG1.24 Y2.2
LS_ENABLE: LG1.26 R16.2 T1.8
MMA_INT1: LG1.4 U2.11
MMA_INT2: LG1.5 TP10.1 U2.9
MMA_VDD: C13.2 C14.2 LG1.30 R7.2 R8.2 U2.1 U2.14
NetC5_2: C5.2 C6.2 IR1.7 R12.1
NetC9_2: C9.2 C10.2 IR2.7 R13.1
NetC15_2: C15.2 U2.2
NetC22_2: C22.2 C23.2 C25.2 LG1.41 LG1.45 R26.2
NetC26_2: C26.2 LG1.59
NetC33_2: C33.2 P1.13 Q1.3
NetC34_1: C34.1 P1.17 R20.1
NetC37_2: C37.2 R21.1
NetC38_1: C38.1 R22.1 R23.1 R24.2
NetD2_1: D2.1 R25.2
NetD3_1: D3.1 L2.2 P2.5
NetH4_4: H4.4 R34.2
NetJ1_1: J1.1 R25.1
NetL1_1: L1.1 P1.14
NetL3_1: L3.1 R26.1
NetM2_25: M2.25 Y3.2
NetM2_27: M2.27 Y3.1
NetP1_1: P1.1 Q1.2
NetP1_2: P1.2 R18.2
NetP1_8: P1.8 R19.2
NetP2_1: P2.1 R21.2
NetP2_2: P2.2 R22.2
NetQ2_2: Q2.2 S2.4
RESET_radio: H3.10 LG1.36 M2.22 PH1.5 R17.1 S1.2
SCL: LG1.56 MTP4.1 Mul1.22 R9.2
SCL0: IR1.5 Mul1.5 R2.1 TP2.1
SCL1: IR2.5 Mul1.7 R4.1 TP4.1
SCL2: Mul1.9 R6.1 TOF.5 TP6.1
SCL3: Mul1.11 R8.1 TP8.1 U2.4
SCL_OUT: D1.1 LG1.40
SDA: LG1.55 MTP3.1 Mul1.23 R10.2
SDA0: IR1.4 Mul1.4 R1.1 TP1.1
SDA1: IR2.4 Mul1.6 R3.1 TP3.1
SDA2: Mul1.8 R5.1 TOF.6 TP5.1
SDA3: Mul1.10 R7.1 TP7.1 U2.6
SDA_OUT: D1.2 LG1.39
SWCLK: LG1.76 PH1.3
SWCLK_radio: H3.4 M2.2
SWDIO: LG1.77 PH1.2
SWDIO_radio: H3.2 M2.3
SWO: LG1.78 PH1.4
TOF_INT0: R14.1 T1.2 TOF.4 TP13.1 TP16.1
TOF_INT0_LS: LG1.7 T1.13 TP11.1
TOF_INT1: R15.1 T1.3 TOF.1 TP12.1
TOF_INT1_LS: LG1.6 T1.12
V_BAT: H2.1 P1.11
VBUS: H4.1 Q1.1 R18.1
VCNL_VDD1: LG1.28 R1.2 R2.2 R12.2
VCNL_VDD2: LG1.29 R3.2 R4.2 R13.2
pads on no net: C2.1 C2.2 C4.1 C4.2 C8.1 C8.2 C9.1 C12.1 H3.6 H3.7 H3.8 H4.2 H4.3 IR1.2 IR1.3 IR1.6 IR1.8 IR1.9 IR1.10 IR1.11 IR2.2 IR2.3 IR2.6 IR2.8 IR2.9 IR2.10 IR2.11 LG1.2 LG1.3 LG1.9 LG1.10 LG1.11 LG1.12 LG1.13 LG1.14 LG1.15 LG1.19 LG1.20 LG1.21 LG1.22 LG1.23 LG1.27 LG1.33 LG1.34 LG1.35 LG1.37 LG1.38 LG1.46 LG1.47 LG1.48 LG1.49 LG1.52 LG1.53 LG1.54 LG1.60 LG1.61 LG1.62 LG1.63 LG1.64 LG1.65 LG1.66 LG1.67 LG1.68 LG1.69 LG1.70 LG1.71 LG1.72 LG1.73 LG1.74 LG1.75 LG1.79 LG1.80 LG1.81 LG1.84 LG1.85 LG1.86 LG1.87 LG1.88 LG1.89 LG1.90 LG1.91 LG1.92 LG1.93 LG1.94 LG1.95 LG1.96 LG1.97 LG1.98 LG1.99 LG1.100 M2.7 M2.8 M2.9 M2.10 M2.11 M2.12 M2.13 M2.15 M2.16 M2.17 M2.18 M2.19 M2.20 M2.21 M2.23 M2.24 M2.28 M2.29 M2.30 M2.32 M2.33 M2.34 M2.35 M2.36 M2.37 M2.38 Mul1.3 Mul1.13 Mul1.14 Mul1.15 Mul1.16 Mul1.17 Mul1.18 Mul1.19 Mul1.20 P1.3 P1.4 P1.6 P1.9 P1.10 P1.15 P1.16 P1.19 P2.7 P2.8 P3.4 R11.1 R11.2 S2.1 T1.4 T1.5 T1.6 T1.9 T1.10 T1.11 T1.15 TOF.2 TOF.3 TOF.7 TOF.11 U2.3 U2.8 U2.13 U2.15 U2.16
copper on no net:
  other v1: 198.281,72.348 199.381,72.348 198.281,73.448 199.381,73.448

## Silkscreen, mask and mechanical layers (free items; w line width, h text height)
Mechanical 16:
  drawing of 1874 lines, arcs and shapes, not listed
  text "1" at -29.286,135.509 h1.78
  text "2" at 43.358,135.509 h1.78
  text "3" at 116.51,135.509 h1.78
  text "4" at 189.408,135.509 h1.78
  text "A" at -63.627,112.497 h1.78
  text "A" at 223.393,112.497 h1.78
  text "B" at -63.627,64.44 h1.78
  text "B" at 223.393,64.44 h1.78
  text "C" at -63.627,15.926 h1.78
  text "C" at 223.393,15.926 h1.78
  text "ENGINEER:" at 108.458,-21.082 h1.14
  text "TITLE:" at 146.558,-21.082 h1.14
  text "PCB DESIGNER:" at 108.458,-28.575 h1.14
  text "D" at -63.627,-32.08 h1.78
  text "D" at 223.393,-32.08 h1.78
  text "DATE:" at 108.458,-36.322 h1.14
  text "PART NO.:" at 146.558,-36.322 h1.14
  text "REV:" at 199.898,-36.322 h1.14
  text "Altium Limited" at 75.438,-38.862 h1.78
  text ".PRINT_DATE" at 109.728,-39.37 h1.78
  text "12a Rodborough Rd" at 75.438,-41.402 h1.78
  text "Frenchs Forest" at 75.438,-43.942 h1.78
  text "FILE NAME:" at 108.458,-43.942 h1.14
  text "DWG NO:" at 146.558,-43.942 h1.14
  text "SCALE:" at 199.898,-43.942 h1.14
  text "NSW 2086" at 75.438,-46.482 h1.78
  text ".PCB_FILE_NAME_NO_PATH" at 109.728,-46.99 h1.78
  text "1" at -29.286,-52.451 h1.78
  text "2" at 43.358,-52.451 h1.78
  text "3" at 116.51,-52.451 h1.78
  text "4" at 189.408,-52.451 h1.78

## Text inside footprints (layer, text, board x,y; h text height)
H3: Top Overlay "10" at 134.62,19.558 h1.27 r90; Top Overlay "9" at 137.16,19.558 h1.27 r90; Top Overlay "1" at 137.16,5.842 h1.27 r90; Top Overlay "2" at 134.62,5.334 h1.27 r90
Q1: Top Overlay "1" at 6.136,16.151 h1.5; Top Overlay "3" at 6.136,13.633 h1.5
Q2: Top Overlay "1" at 115.965,73.453 h1.5; Top Overlay "3" at 115.965,70.935 h1.5